# Altium PCB Viper12A_SMPS_12V_2A_V1.PcbDoc
Units mil, origin at the board's own origin, x right, y up, seen from the top; angles counter-clockwise.
Board outline 2875 x 1425 mil, 2 copper layers (Top Layer, Bottom Layer); 27 components, 18 nets, 70 pads, 0 vias.
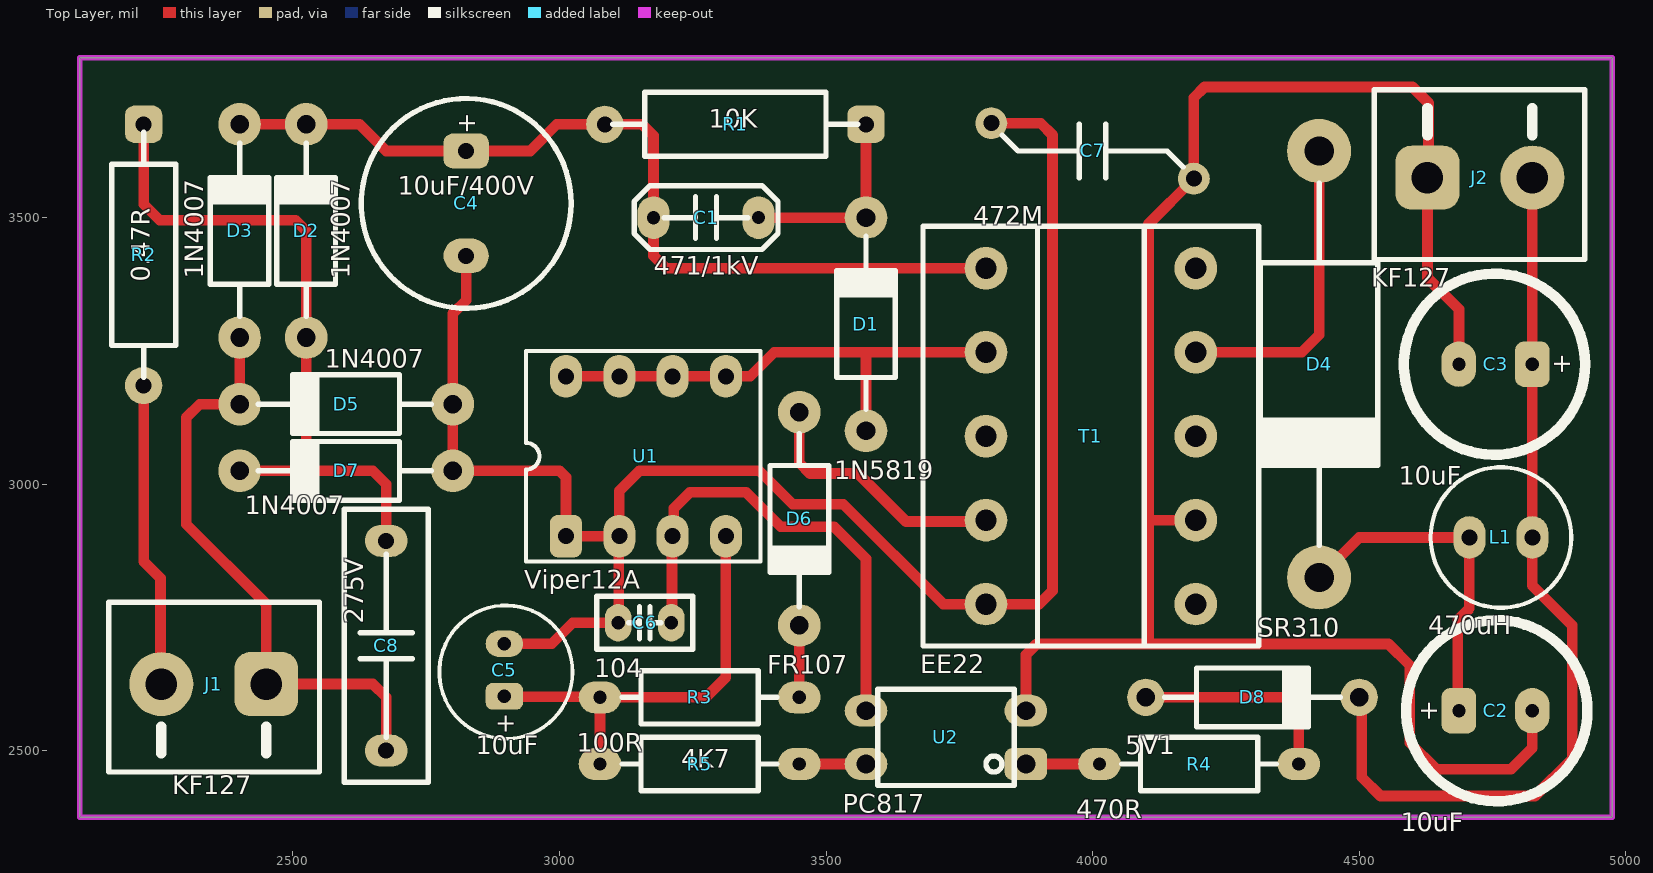
[diagram p0: Top Layer view]
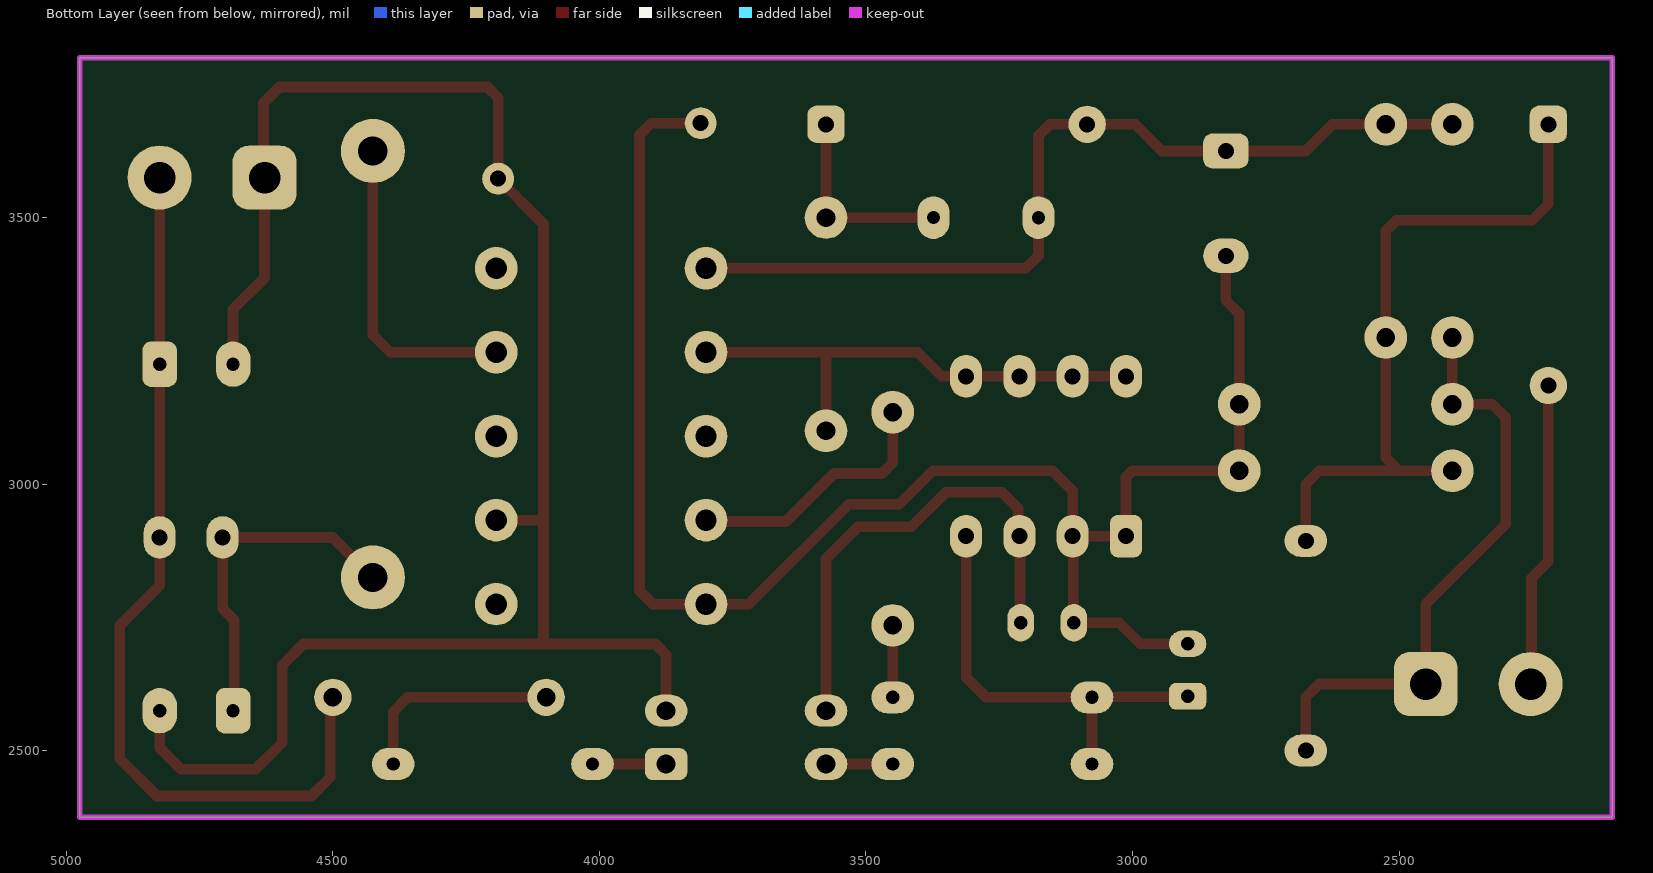
[diagram p1: Bottom Layer view, seen from below]
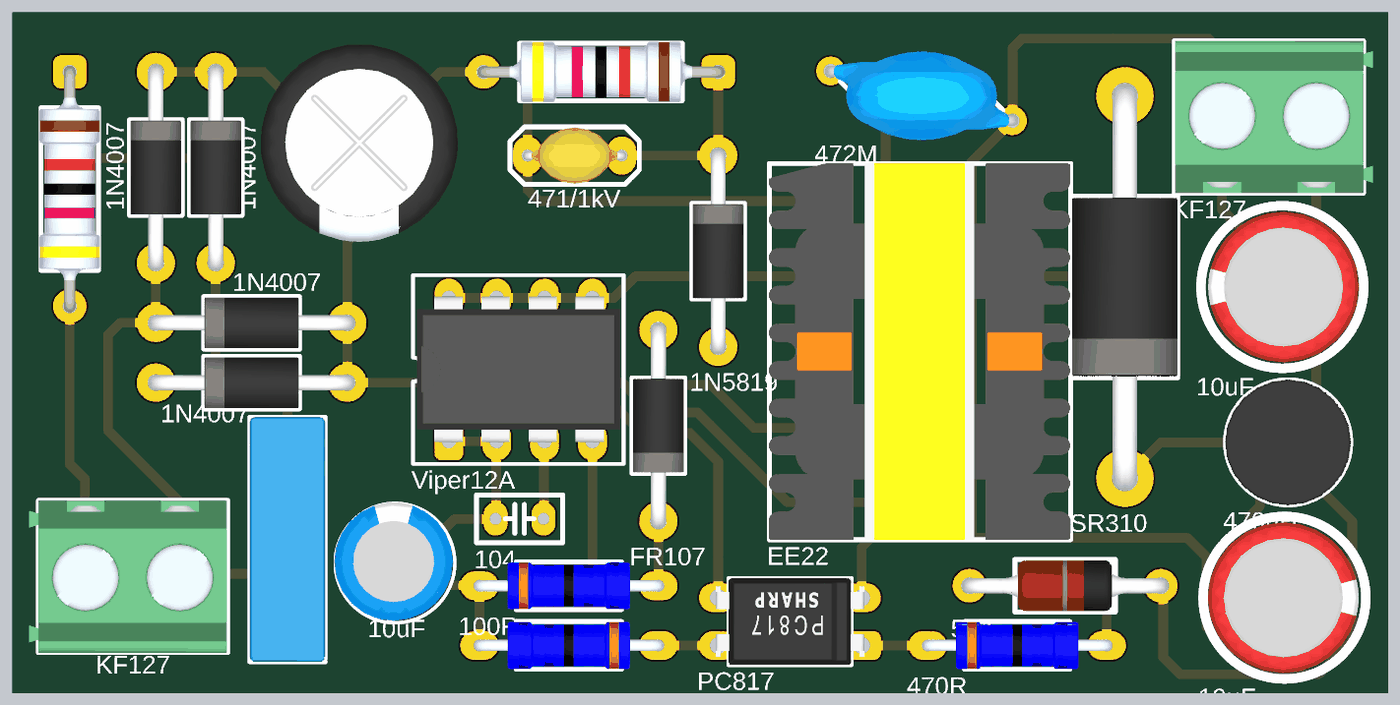
[diagram p2: 3D render of the assembled board from above, using the file's embedded part models]

## Layer stack, top to bottom
Top Solder: solder mask 0.4, Solder Resist, Dk 3.5
Top Layer: signal copper 1.4
Dielectric 1: dielectric 12.6, FR-4, Dk 4.8
Bottom Layer: signal copper 1.4
Bottom Solder: solder mask 0.4, Solder Resist, Dk 3.5

## Board outline
2100,2375 2100,3800 4975,3800 4975,2375

## Design rules (kind name [scope] priority, off if disabled: settings)
Clearance [All] p1: gap=10 ignorepadtopadclearanceinfootprint=FALSE except(0: Arc-Hole Track-Hole SMDPad-Hole THPad-Hole Via-Hole Fill-Hole Poly-Hole Region-Hole Text-Hole)
PolygonConnect [All] p1: connectstyle=Relief reliefconductorwidth=10 reliefentries=4 polygonreliefangle="90 Angle" airgapwidth=10
RoutingVias [All] p1: holewidth=28 width=50 viastyle="Through Hole" minholewidth=28 minwidth=50 maxholewidth=28 maxwidth=50
SolderMaskExpansion [All] p1: expansion=4 istentingtop=FALSE
Width [All] p1: maxlimit=50 minlimit=10 preferedwidth=20
30 further rules are at their usual default settings.

## Components (designator, comment, footprint, x,y, rotation, side; value= is the part's Value field where it differs from the comment)
C1 "471/1kV" CAP_DISC_4x3_YL 3275,3500 r0 top
C2 "10uF" CAP_RAD_3.5mm 4758.27,2575 r0 top
C3 "10uF" CAP_RAD_3.5mm 4753.94,3225 r180 top
C4 "10uF/400V" CAP_RAD_D10x12.5_POL_BK 2825,3526.57 r270 top
C5 "10uF" CAP_RAD_2.5mm 2899.68,2647.48 r90 top
C6 "104" CAP_Ceramic_Disc_2 3160,2740 r0 top
C7 "472M" CAP_DISC_Y2222 4000,3625 r0 top
C8 "275V" CAP_BOX_13x4x7_BL 2675,2500 r90 top
D1 "1N5819" DO-204AL-BK 3575,3300 r90 top
D2 "1N4007" DO-204AL-BK 2525,3475 r90 top
D3 "1N4007" DO-204AL-BK 2400,3475 r90 top
D4 "SR310" DO-201AD-R-BK 4425,3225 r270 top
D5 "1N4007" DO-204AL-BK 2600,3150 r180 top
D6 "FR107" DO-204AL-BK 3450,2935 r270 top
D7 "1N4007" DO-204AL-BK 2600,3025 r180 top
D8 "5V1" DO-204AL-RD 4300,2600 r0 top
J1 "KF127" DG127-5.0-02P-14-00AH 2450,2625 r180 top
J2 "KF127" DG127-5.0-02P-14-00AH 4628.15,3575 r0 top
L1 "470uH" RLB0712_vertical 4765.94,2900 r0 top
R1 "10K" RES-0.5W-H 3330,3675 r180 top
R2 "0.47R" RES-0.5W-H 2220,3430 r270 top
R3 "100R" RES-0.25W-H 3263,2600 r0 top
R4 "470R" RES-0.25W-H 4200,2475 r0 top
R5 "4K7" RES-0.25W-H 3263,2475 r180 top
T1 "EE22" TRANSFORMER-EE22-VERTICAL(5+5) 3996.85,3089.96 r0 top
U1 "Viper12A" DIP-8 3150,3050 r90 top
U2 "PC817" PC817-DIP 3725,2525 r180 top

## Footprints (in the part's own frame and the unit in brackets; to place one, negate y for a bottom-side part, rotate by r counter-clockwise, add the part's x,y. Pads: shape width x height; smd on the part's side, far side on the other; paste and mask are expansions set on the pad)
CAP_BOX_13x4x7_BL [mil]
  oval 60x80 hole 30: 1(0,0) 2(393.7,0)
  silkscreen extent -59,-79 453,79, body extent -59,-79 453,79, height 276
CAP_Ceramic_Disc_2 [mil]
  oval 50x70 hole 25: 1(-50,0) 2(50,0)
  silkscreen extent -90,-50 90,50, body extent -92,-49 92,49, height 289
CAP_DISC_4x3_YL [mil]
  oval 60x80 hole 25: 1(-98.44,0) 2(98.44,0)
  silkscreen extent -135,-60 135,60, body extent -107,-59 107,59, height 215
CAP_DISC_Y2222 [mil]
  round 60 hole 30: 1(-190,52) 2(190,-52)
  silkscreen extent -170,-50 170,50, body extent -202,-93 202,93, height 354
CAP_RAD_2.5mm [mm]
  rrect50% 1.27x1.778 hole 0.635: 1(-1.155,0.075)
  oval 1.27x1.778 hole 0.635: 2(1.345,0.075)
  silkscreen extent -3.17,-3.17 3.17,3.17, body extent -3.07,-3.07 3.23,3.23, height 11.02
CAP_RAD_3.5mm [mil]
  rrect50% 65x85 hole 25: 1(-71.06,0)
  oval 65x85 hole 25: 2(66.73,0)
  silkscreen extent -170,-170 170,170, body extent -160,-157 155,157, height 446
CAP_RAD_D10x12.5_POL_BK [mil]
  rrect50% 65x85 hole 30: 1(-98.43,0)
  oval 65x85 hole 30: 2(98.43,0)
  silkscreen extent -197,-197 197,197, body extent -207,-207 207,207, height 551
DG127-5.0-02P-14-00AH [mil]
  rrect50% 120x120 hole 59.06: 1(0,0)
  round 120 hole 59.06: 2(196.85,0)
  silkscreen extent -100,-154 295,165, body extent -98,-154 315,165, height 398
DIP-8 [mil]
  rrect50% 80x60 hole 30: 1(-147.64,137.8)
  oval 80x60 hole 30: 2(-147.64,37.8) 3(-147.64,-62.2) 4(-147.64,-162.2) 5(152.36,-162.2) 6(152.36,-62.2) 7(152.36,37.8) 8(152.36,137.8)
  silkscreen extent -195,-227 200,213, body extent -150,-220 156,205, height 177
DO-201AD-R-BK [mil]
  round 120 hole 55: 1(-400,0) 2(400,0)
  silkscreen extent -340,-115 340,110, body extent -426,-110 426,110, height 437
DO-204AL-BK [mil]
  round 80 hole 35: 1(-200,0) 2(200,0)
  silkscreen extent -160,-55 165,55, body extent -216,-53 216,53, height 110
DO-204AL-RD [mil]
  round 70 hole 35: 1(-200,0) 2(200,0)
  silkscreen extent -165,-55 165,55, body extent -216,-53 216,53, height 110
PC817-DIP [mil]
  rrect50% 80x60 hole 35: 1(-150,50)
  oval 80x60 hole 35: 2(-150,-50) 3(150,-50) 4(150,50)
  silkscreen extent -128,-90 128,90, body extent -155,-90 155,90, height 169
RES-0.5W-H [mil]
  rrect50% 70x70 hole 30: 1(-245,0)
  round 70 hole 30: 2(245,0)
  silkscreen extent -230,-60 230,60, body extent -258,-63 258,63, height 143
RES-0.25W-H [mil]
  oval 80x60 hole 25: 1(-187,0) 2(187,0)
  silkscreen extent -145,-50 145,50, body extent -199,-49 199,49, height 109
RLB0712_vertical [mil]
  oval 60x80 hole 30 mask+2.76: 1(-59.06,0) 2(59.06,0)
  silkscreen extent -132,-132 132,132, body extent -132,-132 132,132, height 394
TRANSFORMER-EE22-VERTICAL(5+5) [mil]
  round 80 hole 40: 1(-196.85,314.96) 2(-196.85,157.48) 3(-196.85,0) 4(-196.85,-157.48) 5(-196.85,-314.96) 6(196.85,-314.96) 7(196.85,-157.48) 8(196.85,0) 9(196.85,157.48) 10(196.85,314.96)
  silkscreen extent -315,-394 315,394, body extent -316,-394 315,394, height 787

## Part data
C1 C6 C7: library part Capacitors(Disc)
C2 C3 C4 C5: library part Capacitor(Radian)
C8: library part Capacitors(film)
D1: library part Diode-1N5819, "1A - Schotky Diode"
D2 D3 D5 D6 D7: library part Diode-1N4007
D4: library part Diode-SR310, "3A-Schotky"
D8: library part Diode-Zener
J1 J2: library part DG127-5.0-02P-14-00AH
L1: library part Inductors
R1 R2 R3 R4 R5: library part "Resistors THD"
T1: library part TRANS-EE16-HORIZONTAL(5+5)
U1: library part SMPS-Viper12A
U2: library part Opto-PC817

## Nets (pads, with @x,y where several pads share a name; then routed paths per layer and width w, separated by ;. In a path a pad name is that pad's centre, name@x,y a point inside that pad or via, vN(x,y) a via of type N, cw(c..) or ccw(c..) an arc to the next point about the centre after c; other vN are vias at no path point)
GND: C4.2 C5.2 C6.1 C7.1 D5.1 D7.1 T1.5 U1.1 U1.2 | length 3240.4
  Top Layer w20: C4.2 2825,3345 2800,3320 D5.1 D7.1 3000,3025 3012.2,3012.8 U1.1 U1.2 ; C5.2 2985.44,2700.44 3025,2740 C6.1 3111.1,2741.1 3111.1,2901.26 U1.2 ; C7.1 3903,3677 3925,3655 3925,2800 3900,2775 T1.5 3720,2775 3532.5,2962.5 3437.5,2962.5 3375,3025 3150,3025 3112.2,2987.2 U1.2
NetC1_1: C1.1 C4.1 D2.2 D3.2 R1.2 T1.1 | length 1685.1
  Top Layer w20: D3.2 D2.2 2625,3675 2675,3625 C4.1 2945,3625 2995,3675 R1.2 3155,3675 3176.56,3653.44 C1.1 3176.56,3428.44 3200.08,3404.92 T1.1
NetC1_2: C1.2 D1.2 R1.1 | length 376.6
  Top Layer w20: C1.2 D1.2 R1.1
NetC2_1: C2.1 D4.2 L1.1 | length 647.9
  Top Layer w20: D4.2 4500,2900 L1.1 4706.89,2766.89 4685,2745 4685,2577.2 C2.1
NetC2_2: C2.2 C3.2 C7.2 J2.1 T1.7 U2.2 | length 3457
  Top Layer w20: U2.2 3875,2680 3895,2700 4105,2700 ; T1.7 4105,2932.48 ; C3.2 4687.2,3327.8 4628.15,3386.85 J2.1 4630,3576.85 4630,3715 4600,3745 4210,3745 4190,3725 C7.2 4105,3488 4105,2932.48 ; C2.2 4825,2505 4785,2465 4645,2465 4595,2515 4595,2660 4555,2700 4105,2700 ; 4105,2700 4105,2932.48
NetC3_1: C3.1 D8.2 J2.2 L1.2 | length 1711.6
  Top Layer w20: D8.2 4505,2595 4505,2450 4540,2415 4830,2415 4900,2485 4900,2735 4825,2810 L1.2 C3.1 J2.2
NetC5_1: C5.1 R3.1 R5.2 U1.4 | length 840.9
  Top Layer w20: C5.1 2897.73,2601.01 C5.1@2901.47,2601.01 ; C5.1@2896.73,2605.75 C5.1@2901.47,2601.01 ; C5.1@2910.18,2592.3 C5.1@2901.47,2601.01 ; R5.2 R3.1 ; U1.4 3312.2,2637.2 3275,2600 R3.1 ; C5.1@2901.47,2601.01 3074.99,2601.01 R3.1
NetC6_2: C6.2 U1.3 U2.3 | length 926.3
  Top Layer w20: C6.2 3211.1,2741.1 3211.1,2901.26 U1.3 3214.71,2904.87 3214.71,2954.71 3245,2985 3350,2985 3415,2920 3515,2920 3575,2860 U2.3
NetC8_1: C8.1 D3.1 D5.2 J1.1 | length 1132.8
  Top Layer w20: D3.1 D5.2 2325,3150 2300,3125 2300,2925 2450,2775 J1.1 2650,2625 2675,2600 C8.1
NetC8_2: C8.2 D2.1 D7.2 R2.1 | length 1327.7
  Top Layer w20: R2.1 2220,3525 2250,3495 2505,3495 2525,3475 D2.1 2525,3050 2500,3025 ; D7.2 2500,3025 ; C8.2 2675,3000 2650,3025 2500,3025
NetD1_1: D1.1 T1.2 U1.5 U1.6 U1.7 U1.8 | length 953.9
  Top Layer w20: U1.8 U1.7 U1.6 U1.5 3357.64,3202.36 3402.72,3247.44 3575,3247.44 ; D1.1 3575,3247.44 ; T1.2 3575,3247.44
NetD4_1: D4.1 T1.9 | length 589.8
  Top Layer w20: T1.9 4392.44,3247.44 4425,3280 D4.1
NetD6_1: D6.1 T1.4 | length 491.6
  Top Layer w20: D6.1 3450,3040 3470,3020 3560,3020 3650,2930 3797.52,2930 T1.4
NetD6_2: D6.2 R3.2 | length 139.9
  Top Layer w20: R3.2@3438.28,2600 3450,2611.72 D6.2
NetD8_1: D8.1 R4.2 | length 396.2
  Top Layer w20: D8.1 4360,2600 4387,2573 R4.2
NetJ1_2: J1.2 R2.2 | length 573.7
  Top Layer w20: R2.2 2220,2855 2251.57,2823.43 2251.57,2626.57 J1.2
NetR4_1: R4.1 U2.1 | length 138
  Top Layer w20: U2.1 R4.1
NetR5_1: R5.1 U2.4 | length 125
  Top Layer w20: R5.1 U2.4
pads on no net: T1.3 T1.6 T1.8 T1.10

## Keep-outs
Keep-Out Layer:
  the board outline again, w10

## Text inside footprints (layer, text, board x,y; h text height)
C2: Top Overlay "+" at 4658.82,2595 h60 r90
C3: Top Overlay "+" at 4853.39,3205 h60 r270
C4: Top Overlay "+" at 2799.45,3696.57 h60 r270
C5: Top Overlay "+" at 2879.68,2578.03 h60 r180